# Altium PCB PCB1.PcbDoc
Units mm, origin at the board's own origin, x right, y up, seen from the top; angles counter-clockwise.
Board outline 100 x 70 mm, 2 copper layers (Top Layer, Bottom Layer); 33 components, 28 nets, 109 pads, 8 vias.
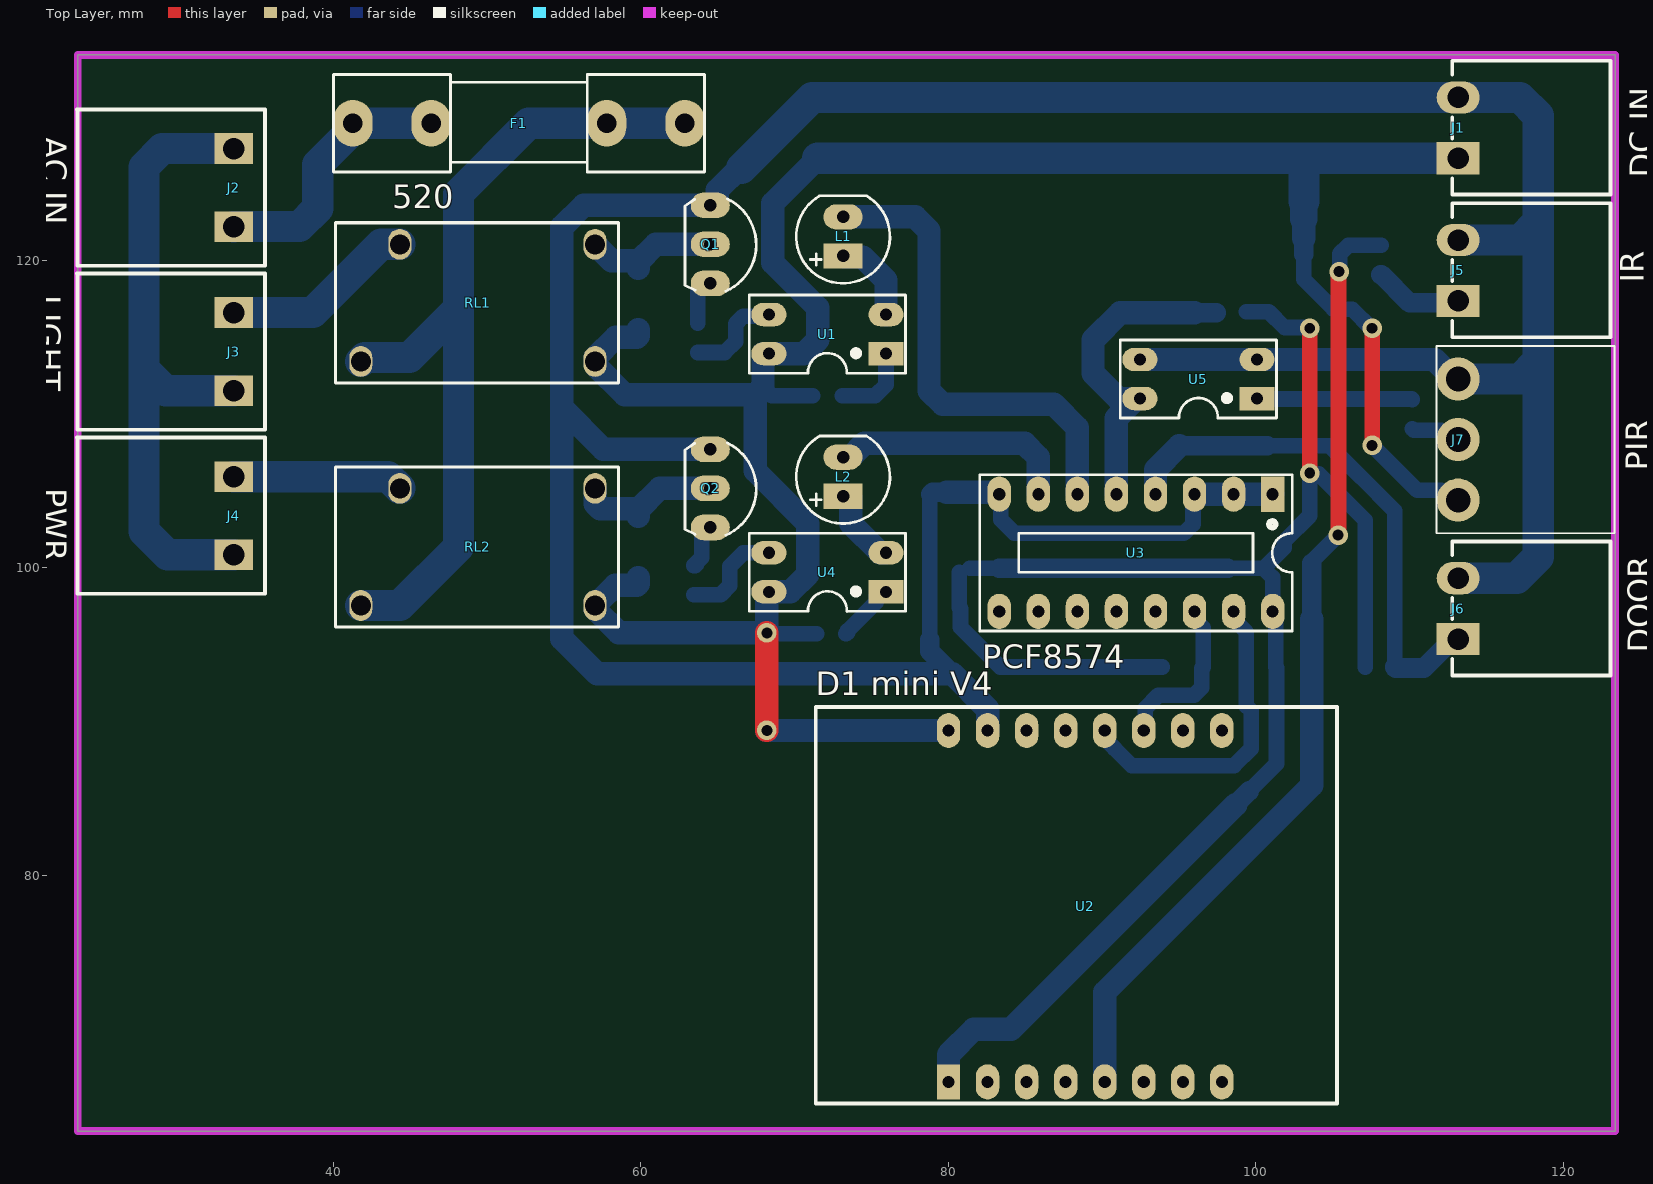
[diagram p0: Top Layer view]
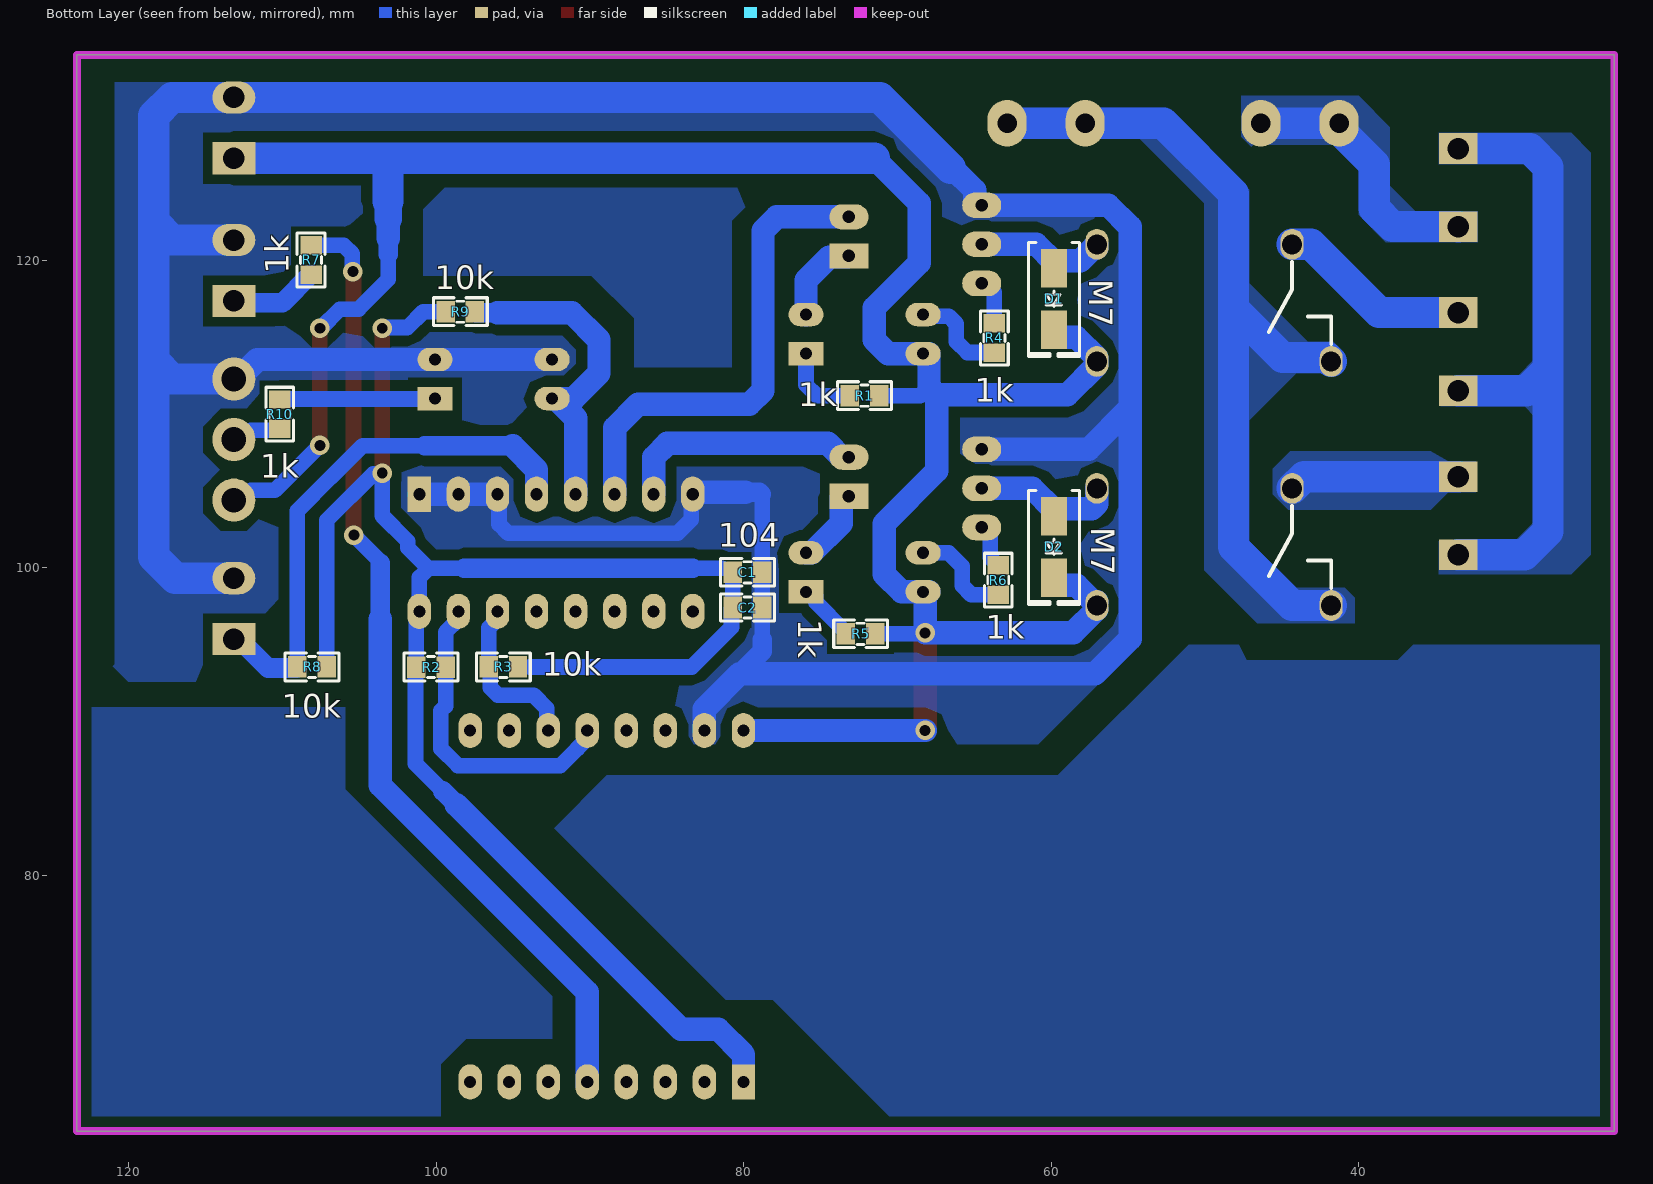
[diagram p1: Bottom Layer view, seen from below]

## Layer stack, top to bottom
Top Solder: solder mask 0.0102, Solder Resist, Dk 3.5
Top Layer: signal copper 0.0356
Dielectric 1: dielectric 0.32, FR-4, Dk 4.8
Bottom Layer: signal copper 0.0356
Bottom Solder: solder mask 0.0102, Solder Resist, Dk 3.5

## Board outline
23.368,63.35 23.368,133.35 123.368,133.35 123.368,63.35

## Design rules (kind name [scope] priority, off if disabled: settings)
Clearance [All] p1: gap=0.635 ignorepadtopadclearanceinfootprint=FALSE
PolygonConnect [All] p1: connectstyle=Direct reliefconductorwidth=0.254 reliefentries=4 polygonreliefangle="90 Angle" airgapwidth=0.254
RoutingVias [All] p1: holewidth=0.711 width=1.27 viastyle="Through Hole" minholewidth=0.711 minwidth=1.27 maxholewidth=0.711 maxwidth=1.27
SolderMaskExpansion [All] p1: expansion=0.102 istentingtop=FALSE
SupplyNets "Schematic Supply Nets_2" [InNet('GND')] p1: voltage=0.000
SupplyNets "Schematic Supply Nets_1" [InNet('+3.3')] p2: voltage=0.000
SupplyNets "Schematic Supply Nets" [InNet('+5')] p3: voltage=0.000
Width [All] p1: maxlimit=2.032 minlimit=1.016 preferedwidth=1.524
30 further rules are at their usual default settings.

## Components (designator, comment, footprint, x,y, rotation, side; value= is the part's Value field where it differs from the comment)
C1 "104" "tu 0805" 79.756,99.695 r180 bottom
C2 "104" "tu 0805" 79.756,97.409 r180 bottom
D1 "M7" "DIODE SMA" 59.817,117.475 r270 bottom
D2 "M7" "DIODE SMA" 59.817,101.346 r270 bottom
F1 "520" "De Cau Chi 520 630" 52.07,128.905 r180 top
J1 "DC IN" "CON 2 HT3.96" 113.157,126.619 r90 top
J2 "AC IN" "CON 2 2EDG5.08 B" 33.528,122.174 r90 top
J3 "LIGHT" "CON 2 2EDG5.08 B" 33.528,111.506 r90 top
J4 "PWR" "CON 2 2EDG5.08 B" 33.528,100.838 r90 top
J5 "IR" "CON 2 HT3.96" 113.157,117.348 r90 top
J6 "DOOR" "CON 2 HT3.96" 113.157,95.354 r90 top
J7 "PIR" KF3-3.96 113.157,108.331 r90 top
L1 "LED 5mm" LED-5MM-RED 73.152,120.269 r90 top
L2 "LED 5mm" LED-5MM-RED 73.152,104.648 r90 top
Q1 "C1815" TO92 64.516,121.031 r270 top value=C9014
Q2 "C1815" TO92 64.516,105.156 r270 top value=C9014
R1 "1k" "tro smd 0805" 72.136,111.125 r0 bottom
R2 "10k" "tro smd 0805" 100.33,93.472 r0 bottom
R3 "10k" "tro smd 0805" 95.631,93.599 r180 bottom
R4 "1k" "tro smd 0805" 63.754,114.935 r90 bottom
R5 "1k" "tro smd 0805" 72.39,95.631 r0 bottom
R6 "1k" "tro smd 0805" 63.5,99.187 r90 bottom
R7 "1k" "tro smd 0805" 108.077,120.015 r270 bottom
R8 "10k" "tro smd 0805" 108.077,93.599 r180 bottom
R9 "10k" "tro smd 0805" 98.425,116.586 r0 bottom
R10 "1k" "tro smd 0805" 110.236,109.982 r90 bottom
RL1 "HF32F-G/005-HS" HF32F-G 57.023,121.031 r180 top
RL2 "HF32F-G/005-HS" HF32F-G 57.023,105.156 r180 top
U1 "PC817" DIP4 75.946,113.919 r90 top
U2 "D1 mini V4" "WEMOS D1 MINI V4 USD" 80.01,66.548 r90 top
U3 "PCF8574" DIP16 83.185,104.775 r270 top
U4 "PC817" DIP4 75.946,98.425 r90 top
U5 "PC817" DIP4 100.076,110.998 r90 top

## Footprints (in the part's own frame and the unit in brackets; to place one, negate y for a bottom-side part, rotate by r counter-clockwise, add the part's x,y. Pads: shape width x height; smd on the part's side, far side on the other; paste and mask are expansions set on the pad)
"CON 2 2EDG5.08 B" [mm]
  rect 2x2.5 hole 1.4: 1(0,0) 2(5.08,0)
  silkscreen extent -2.54,-2.03 7.62,10.21, body extent -2.5,-1.75 7.58,10.25, height 3.15
"CON 2 HT3.96" [mm]
  rect 2.1x2.794 hole 1.4: 1(0,0)
  oval 2.1x2.794 hole 1.4: 2(3.96,0)
  silkscreen extent -2.36,-9.91 6.35,0.38, body extent -1.97,-10 6.03,0, height 7.02
"De Cau Chi 520 630" [mil] "De Fuse"
  oval 100x120 hole 50: 1(-425,0) 1(-225,0) 2(225,0) 2(425,0)
  silkscreen extent -475,-125 475,125, body extent -448,-117 459,127, height 378
"DIODE SMA" [mm] "SMA"
  rect 2.5x1.7 smd: 1(-2,0) 2(2,0)
  silkscreen extent -3.68,-1.65 3.75,1.65, body extent -2.6,-1.37 2.6,1.37, height 2.4
DIP4 [mil]
  rect 60x90 hole 31: 1(0,0)
  oval 60x90 hole 31: 2(100,0) 3(100,300) 4(0,300)
  silkscreen extent -50,-50 150,350, body extent -59,-10 159,305, height 170
DIP16 [mil] "16 PIN, W 300mil, Pin to pin 100mil"
  rect 90x60 hole 31: 1(0,705)
  oval 90x60 hole 31: 2(0,605) 3(0,505) 4(0,405) 5(0,305) 6(0,205) 7(0,105) 8(0,5) 9(300,5) 10(300,105) 11(300,205) 12(300,305) 13(300,405) 14(300,505) 15(300,605) 16(300,705)
  silkscreen extent -50,-45 350,755, body extent -57,-47 356,757, height 299
HF32F-G [mm] "Hongfa 10A 4 pins"
  oval 1.5x2 hole 1.3: 1(15.24,7.62) 3(12.7,0) 4(0,0) 5(0,7.62)
  silkscreen extent -1.52,-1.4 16.89,9.02, body extent -1.25,-1.19 16.75,8.81, height 15
KF3-3.96 [mm] "3,96mm - modular - green - Horizontal wire entry - Pressure clamp - 10mm height - 03p"
  round 2.8 hole 1.6: 1(-3.937,0) 2(0,0) 3(3.937,0)
  silkscreen extent -6.1,-10.16 6.1,1.4, body extent -5.94,-9.98 5.94,0.51, height 7.36
LED-5MM-RED [mil] "LED 2 PIN, 5 ly , Only colour,pin to pin 100mil"
  rect 65x100 hole 32: 1(0,0)
  oval 65x100 hole 32: 2(100,0)
  silkscreen extent -70,-120 154,120, body extent -65,-119 149,118, height 339
TO92 [mil] "TO-92"
  oval 66x100 hole 32: 1(-100,0) 2(0,0) 3(100,0)
  silkscreen extent -117,-65 120,118, body extent -109,-66 109,95, height 245
"tro smd 0805" [mm]
  rect 1.2x1.4 smd: 1(-0.946,-0.061) 2(0.954,-0.061)
  silkscreen extent -1.75,-0.97 1.75,0.84, body extent -1.56,-0.76 1.44,0.64, height 0.53
"tu 0805" [mm] "Compoment SMD 80x50mil"
  rect 1.2x1.4 smd: 1(-0.946,-0.003) 2(0.954,-0.003)
  silkscreen extent -1.75,-0.89 1.75,0.89, body extent -1.01,-0.64 1.01,0.63, height 0.61
"WEMOS D1 MINI V4 USD" [mil]
  oval 90x60 hole 31: 1(900,0) 2(900,-100) 3(900,-200) 4(900,-300) 5(900,-400) 6(900,-500) 7(900,-600) 8(900,-700) 9(0,-700) 10(0,-600) 11(0,-500) 12(0,-400) 13(0,-300) 14(0,-200) 15(0,-100)
  rect 90x60 hole 31: 16(0,0)
  silkscreen extent -55,-995 960,340, body extent -47,-991 957,333, height 173

## Part data
C1 C2: library part "Tu 0805 104 50V 10%", "Dán", Chung_Loai=Dán, Don_Vi=Con, Ma_Hang=MH004551, So_Chan=2, Ten_Linh_Kien="Tụ 0805 104-100nF 10% 50V"
D1 D2: library part "Diode M7 ( 4007 )", "Dán", Chung_Loai=Dán, Don_Vi=Con, Ma_Hang=MH000944, Ten_Linh_Kien="Diode M7 1N4007 SMD 1A 1000V"
F1: library part "De Cau Chi 520 630", "5x20mm", Ma_Hang=MH001473, Ten="Đế Cầu Chì 5x20MM 6x30MM SMD01"
J1 J2 J3 J4 J5 J6: library part "CON 2 EDG", "CON2 KF terminal"
J7: library part "CON 3 EDG", "CON3 KF terminal"
L1 L2: library part "LED 5mm Do", "Cắm", Chung_Loai=Cắm, Don_Vi=Con, Ma_Hang=MH008967, Ten_Linh_Kien="Led 5MM Phủ Đỏ (1000c)"
Q1 Q2: library part "Trans C1815 DIP", "NPN transistor"
R1 R4 R5 R6 R7 R10: library part "Tro 0805 1% 1k", "Dán", Chung_Loai=Dán, Don_Vi=Con, Ma_Hang=MH005468, So_Chan=2, Ten_Linh_Kien="Trở 0805 1% 1k"
R2 R3 R8 R9: library part "Tro 0805 1% 10k", "Dán", Chung_Loai=Dán, Don_Vi=Con, Ma_Hang=MH005473, So_Chan=2, Ten_Linh_Kien="Trở 0805 1% 10k"
RL1 RL2: library part "Relay HF 10A", "Relay hongfa 10A 4P HF32F-G/005-HS"
U1 U4 U5: "Single Opto"
U2: library part "Wemos D1 mini V4.0", "ESP8266 D1"

## Via types
v1: diameter 1.27, hole 0.711, Top Layer to Bottom Layer, 8 vias

## Nets (pads, with @x,y where several pads share a name; then routed paths per layer and width w, separated by ;. In a path a pad name is that pad's centre, name@x,y a point inside that pad or via, vN(x,y) a via of type N, cw(c..) or ccw(c..) an arc to the next point about the centre after c; other vN are vias at no path point)
+3.3: C1.1 C2.1 R2.2 R3.2 R8.2 R9.2 U2.16 U3.16 | length 116.5
  Top Layer w1.016: v1(103.505,106.146) v1(103.505,115.57)
  Bottom Layer w1.016: C1.1 C2.1 80.794,97.314 80.794,96.117 83.373,93.538 93.915,93.538 ; 81.389,99.949 83.312,99.949 ; 98.171,99.949 100.497,99.949 ; R9.2 100.84,116.647 101.868,115.619 103.456,115.619 v1(103.505,115.57) ; 99.568,85.471 101.346,87.249 101.346,93.471 R2.2 101.284,96.444 101.092,96.637 101.092,99.354 100.497,99.949 ; v1@103.505,106.238 103.505,103.378 101.854,101.727 101.854,101.306 100.497,99.949 ; v1@104.087,106.098 107.123,103.062 R8.2
  Bottom Layer w1.27: 83.312,99.949 98.171,99.949 ; 98.679,84.582 99.568,85.471
  Bottom Layer w1.524: U2.16@80.01,66.294 80.01,68.326 81.661,69.977 84.074,69.977 98.679,84.582
+5: D1.2 D2.2 J1.1 J7.1 R1.1 R5.1 RL1.5 RL2.5 U1.4 U2.1 U4.4 | length 166.3
  Top Layer w1.016: v1(107.569,107.95) v1(107.569,115.57)
  Top Layer w1.524: v1(68.199,89.408) v1(68.199,95.758)
  Bottom Layer w1.016: 67.945,111.764 68.523,111.186 R1.1 ; v1(68.199,95.758) 68.268,95.758 68.334,95.692 R5.1 ; 103.124,120.396 103.124,118.745 105.055,116.814 106.256,116.814 107.5,115.57 v1(107.569,115.57) ; v1(107.569,107.95) 110.49,105.029 112.039,105.029 112.674,104.394 J7.1
  Bottom Layer w1.27: 103.124,120.396 103.124,121.412
  Bottom Layer w1.524: RL2.5@57.023,97.762 57.035,97.774 57.261,97.774 58.345,98.858 59.729,98.858 59.817,98.946 D2.2 ; RL2.5@57.035,97.298 58.575,95.758 v1(68.199,95.758) 68.199,98.425 67.945,98.425 69.723,98.425 70.866,99.568 70.866,102.863 67.433,106.296 67.433,111.252 ; D1.2 59.817,115.075 59.729,114.987 58.373,114.987 57.023,113.637 RL1.5 57.023,113.185 58.956,111.252 67.433,111.252 ; v1(68.199,89.408) U2.1 ; 71.501,126.619 68.58,123.698 68.58,119.826 71.501,116.905 71.501,114.812 70.608,113.919 67.945,113.919 67.945,111.764 67.433,111.252 ; 103.124,121.412 103.124,122.682
  Bottom Layer w1.778: 103.124,122.682 103.124,123.825
  Bottom Layer w2.032: 71.501,126.619 103.124,126.619 ; 103.124,123.825 103.124,126.619 ; J1.1 103.124,126.619
AC_L: F1.1 RL1.1 RL2.1 | length 55.3
  Bottom Layer w2.032: RL2.1 44.323,97.536 48.133,101.346 48.133,116.84 ; RL1.1 42.037,113.665 44.958,113.665 48.133,116.84 ; F1.1@62.865,128.905 57.785,128.905 52.705,128.905 48.133,124.333 48.133,116.84
AC_N: J2.2 J3.1 J4.1 | length 42.9
  Bottom Layer w2.032: J4.1 29.21,100.838 27.686,102.362 27.686,112.903 ; J3.1 29.083,111.506 27.686,112.903 ; J2.2 28.876,127.254 27.686,126.064 27.686,112.903
DOOR: J6.1 R8.1 U3.4 | length 34.7
  Bottom Layer w1.016: 100.737,107.924 104.786,107.924 106.793,105.918 106.807,105.918 109.023,103.702 R8.1
  Bottom Layer w1.27: 95.025,107.924 100.737,107.924 ; R8.1 109.023,93.508 109.058,93.473 109.088,93.473 109.089,93.472 110.928,93.472 112.81,95.354 J6.1
  Bottom Layer w1.524: U3.4 93.472,106.372 95.025,107.924
GND: C1.2 C2.2 J1.2 J5.2 J6.2 J7.3 Q1.1 Q2.1 U2.2 U3.1 U3.2 U3.3 U3.8 U5.2 U5.3 | length 242.4
  Bottom Layer w1.016: 78.802,95.312 C2.2 C1.2 78.802,104.71 ; U2.2@82.453,89.505 U2.2 ; U3.8 83.409,104.678 83.409,103.127 84.301,102.235 95.32,102.235 95.915,102.83 95.915,104.678 U3.3
  Bottom Layer w1.27: 78.802,95.312 78.802,94.553 80.264,93.091 ; 78.867,104.775 78.994,104.902 79.883,104.902
  Bottom Layer w1.524: Q2.1 57.551,107.696 54.864,110.383 ; 66.421,125.984 64.977,124.54 64.977,123.641 64.907,123.571 56.277,123.571 54.864,122.158 54.864,110.383 ; 79.883,104.902 83.312,104.902 U3.8 ; U2.2 82.55,90.805 80.264,93.091 57.15,93.091 54.864,95.377 54.864,110.383 ; U5.3 U5.2 111.626,113.538 112.896,112.268 J7.3 ; U3.3 U3.2 U3.1
  Bottom Layer w2.032: 66.548,125.984 71.143,130.579 J1.2 117.174,130.579 118.364,129.389 118.364,122.498 ; J6.2 116.967,99.314 118.364,100.711 118.364,113.458 ; J7.3 117.174,112.268 118.364,113.458 ; J5.2 117.174,121.308 118.364,122.498 ; 118.364,113.458 118.364,122.498
IR: R7.1 U2.12 | length 63.3
  Top Layer w1.016: v1@105.345,102.177 105.377,102.209 105.377,119.22 v1(105.41,119.253)
  Bottom Layer w1.016: 103.632,100.272 103.632,100.395 v1(105.345,102.108) ; v1(105.41,119.253) 105.459,119.302 105.459,120.414 106.005,120.961 R7.1
  Bottom Layer w1.27: 103.632,96.647 103.632,100.272
  Bottom Layer w1.524: U2.12@90.17,66.294 90.17,72.375 103.632,85.837 103.632,96.647
NetD1_1: D1.1 Q1.2 RL1.4 | length 9
  Bottom Layer w1.524: RL1.4 57.023,120.805 57.035,120.793 57.261,120.793 58.091,119.963 59.729,119.963 D1.1@59.817,119.875 ; D1.1 D1.1@59.817,119.875 ; Q1.2 60.973,121.031 D1.1@59.817,119.875
NetD2_1: D2.1 Q2.2 RL2.4 | length 9.6
  Bottom Layer w1.524: RL2.4 57.035,105.144 57.035,104.144 57.345,103.834 59.729,103.834 D2.1@59.817,103.746 ; D2.1 D2.1@59.817,103.746 ; Q2.2 61.227,105.156 D2.1@59.817,103.746
NetF1_2: F1.2 J2.1 | length 17.5
  Bottom Layer w2.032: J2.1 33.544,122.19 37.799,122.19 38.989,123.38 38.989,126.228 41.275,128.514 41.275,128.905 F1.2@46.355,128.905
NetJ3_2: J3.2 RL1.3 | length 12.6
  Bottom Layer w2.032: J3.2 38.655,116.586 43.1,121.031 RL1.3
NetJ4_2: J4.2 RL2.3 | length 11.1
  Bottom Layer w2.032: J4.2 43.561,105.918 RL2.3
NetJ5_1: J5.1 R7.2 | length 5.8
  Bottom Layer w1.27: R7.2 108.168,119.061 110.007,117.221 113.03,117.221 J5.1
NetJ7_2: J7.2 R10.1 | length 3.3
  Bottom Layer w1.016: R10.1 110.267,108.944 112.061,108.944 112.674,108.331 J7.2 J7.2@113.124,108.364
NetL1_1: L1.1 U1.2 | length 5.7
  Bottom Layer w1.524: L1.1 73.215,120.206 74.425,120.206 75.946,118.684 U1.2
NetL2_1: L2.1 U4.2 | length 5.3
  Bottom Layer w1.524: L2.1 73.596,104.648 73.66,104.584 73.66,102.87 75.565,100.965 U4.2
NetQ1_3: Q1.3 R4.2 | length 3.1
  Bottom Layer w1.016: R4.2 63.693,117.921 64.263,118.491 Q1.3
NetQ2_3: Q2.3 R6.2 | length 3.2
  Bottom Layer w1.016: R6.2 63.539,100.141 63.631,100.233 63.631,100.333 63.958,100.66 63.958,102.311 64.263,102.616 Q2.3 Q2.3@64.549,102.583
NetR1_2: R1.2 U1.1 | length 5.2
  Bottom Layer w1.016: R1.2 75.245,111.186 75.946,111.887 U1.1
NetR4_1: R4.1 U1.3 | length 6.3
  Bottom Layer w1.016: R4.1 65.445,113.989 66.167,114.712 66.167,115.864 66.665,116.362 68.229,116.362 U1.3
NetR5_2: R5.2 U4.1 | length 4
  Bottom Layer w1.016: R5.2 73.436,95.784 73.436,95.884 75.311,97.758 75.311,98.171 75.565,98.425 U4.1
NetR6_1: R6.1 U4.3 | length 6.7
  Bottom Layer w1.016: R6.1 65.191,98.241 65.786,98.837 65.786,100.076 66.675,100.965 U4.3
NetR10_2: R10.2 U5.1 | length 10.1
  Bottom Layer w1.016: U5.1 100.107,110.967 110.144,110.967 R10.2
PIR: R9.1 U3.5 U5.4 | length 21.5
  Bottom Layer w1.016: R9.1@97.419,116.586 R9.1
  Bottom Layer w1.27: U5.4@92.407,111.047 U5.4 ; 96.012,116.586 R9.1@97.419,116.586
  Bottom Layer w1.524: U3.5 90.932,109.728 U5.4@92.202,110.998 ; U5.4 U5.4@92.202,110.998 ; 96.012,116.586 91.186,116.586 89.408,114.808 89.408,112.649 91.059,110.998 U5.4@92.202,110.998
R1: L1.2 U3.6 | length 31.3
  Bottom Layer w1.524: L1.2 77.847,122.809 78.74,121.916 78.74,111.51 79.633,110.617 86.868,110.617 88.392,109.093 U3.6
R2: L2.2 U3.7 | length 15.8
  Bottom Layer w1.524: L2.2 73.631,107.188 74.52,108.077 84.959,108.077 85.852,107.184 U3.7
SCL: R3.1 U2.6 U3.14 | length 11.1
  Bottom Layer w1.016: U2.6 92.807,89.505 U2.6@92.807,89.632 ; U2.6@92.71,89.535 U2.6@92.807,89.632 ; U3.14 96.012,96.637 96.577,96.072 R3.1 96.485,93.446 96.485,92.197 95.981,91.694 93.656,91.694 92.807,90.845 U2.6@92.807,89.632
SDA: R2.1 U2.5 U3.15 | length 20.5
  Bottom Layer w1.016: U2.5 90.17,88.89 90.805,88.255 90.805,88.238 91.921,87.122 98.579,87.122 99.695,88.238 99.695,90.68 99.384,90.991 R2.1 ; U3.15 98.552,96.637 99.384,95.804 R2.1@99.384,93.633
pads on no net: U2.3 U2.4 U2.7 U2.8 U2.9 U2.10 U2.11 U2.13 U2.14 U2.15 U3.9 U3.10 U3.11 U3.12 U3.13

## Polygon pours and split planes (outlines as drawn)
NetJ4_2 on Bottom Layer "NETJ4_2_L02_P009" (solid, remove dead copper, pour order 9): 32.385,106.934 34.163,106.934 35.306,107.569 44.45,107.569 45.593,106.426 45.593,104.775 44.577,103.759 35.306,103.759 34.163,104.902 32.385,104.902
AC_L on Bottom Layer "AC_L_L02_P008" (solid, remove dead copper, pour order 8): 56.896,127.889 54.229,127.889 50.038,123.698 50.038,99.822 46.609,96.393 40.259,96.393 40.259,98.044 40.894,98.679 44.069,98.679 47.117,101.727 47.117,109.601 44.069,112.649 41.148,112.649 41.148,114.173 41.656,114.681 43.307,114.681 47.117,118.491 47.117,124.587 52.451,129.921 56.896,129.921
NetF1_2 on Bottom Layer "NETF1_2_L02_P007" (solid, remove dead copper, pour order 7): 36.322,123.19 37.973,124.841 37.973,128.651 40.005,130.683 47.625,130.683 47.625,128.016 46.99,127.381 46.863,127.508 41.656,127.508 40.005,125.857 40.005,122.936 38.227,121.158 32.258,121.158 32.258,123.19
AC_N on Bottom Layer "AC_N_L02_P006" (solid, remove dead copper, pour order 6): 26.162,128.27 24.892,127 24.892,100.838 26.162,99.568 34.798,99.568 34.798,101.727 29.845,101.727 28.575,102.997 28.575,109.855 29.21,110.49 34.671,110.49 34.671,112.268 34.798,112.395 29.591,112.395 29.591,112.522 28.575,113.538 28.575,125.73 28.702,125.73 29.21,126.238 34.798,126.238 34.798,128.27
GND on Bottom Layer "GND_L02_P005" (solid, remove dead copper, pour order 5): 54.356,122.174 54.356,94.996 60.833,88.519 104.267,88.519 104.267,91.44 105.41,92.583 120.015,92.583 121.031,93.599 120.904,93.726 120.904,131.572 71.374,131.572 64.008,124.206 56.134,124.206
no net on Bottom Layer "NONET_L02_P004" (solid, pour order 4): 123.317,90.932 123.317,63.373 123.19,63.246 99.695,63.246 99.695,67.691 98.044,69.342 92.456,69.342 92.456,72.136 105.918,85.598 105.918,90.932
no net on Bottom Layer "NONET_L02_P003" (solid, pour order 3): 80.772,113.03 87.122,113.03 87.122,116.205 89.916,118.999 100.838,118.999 100.838,123.317 99.441,124.714 79.121,124.714 79.121,124.206 80.772,122.555
no net on Bottom Layer "NONET_L02_P001" (solid, pour order 1): 23.876,94.996 36.449,94.996 37.465,93.98 47.272,93.98 47.802,94.996 51.054,94.996 59.563,86.487 88.9,86.487 92.329,83.058 81.153,71.882 78.105,71.882 70.231,64.008 23.622,64.008

## Keep-outs
Keep-Out Layer:
  the board outline again, w0.508